# EAGLE board PC Temperature Controller (EAGLE 6.5.0)
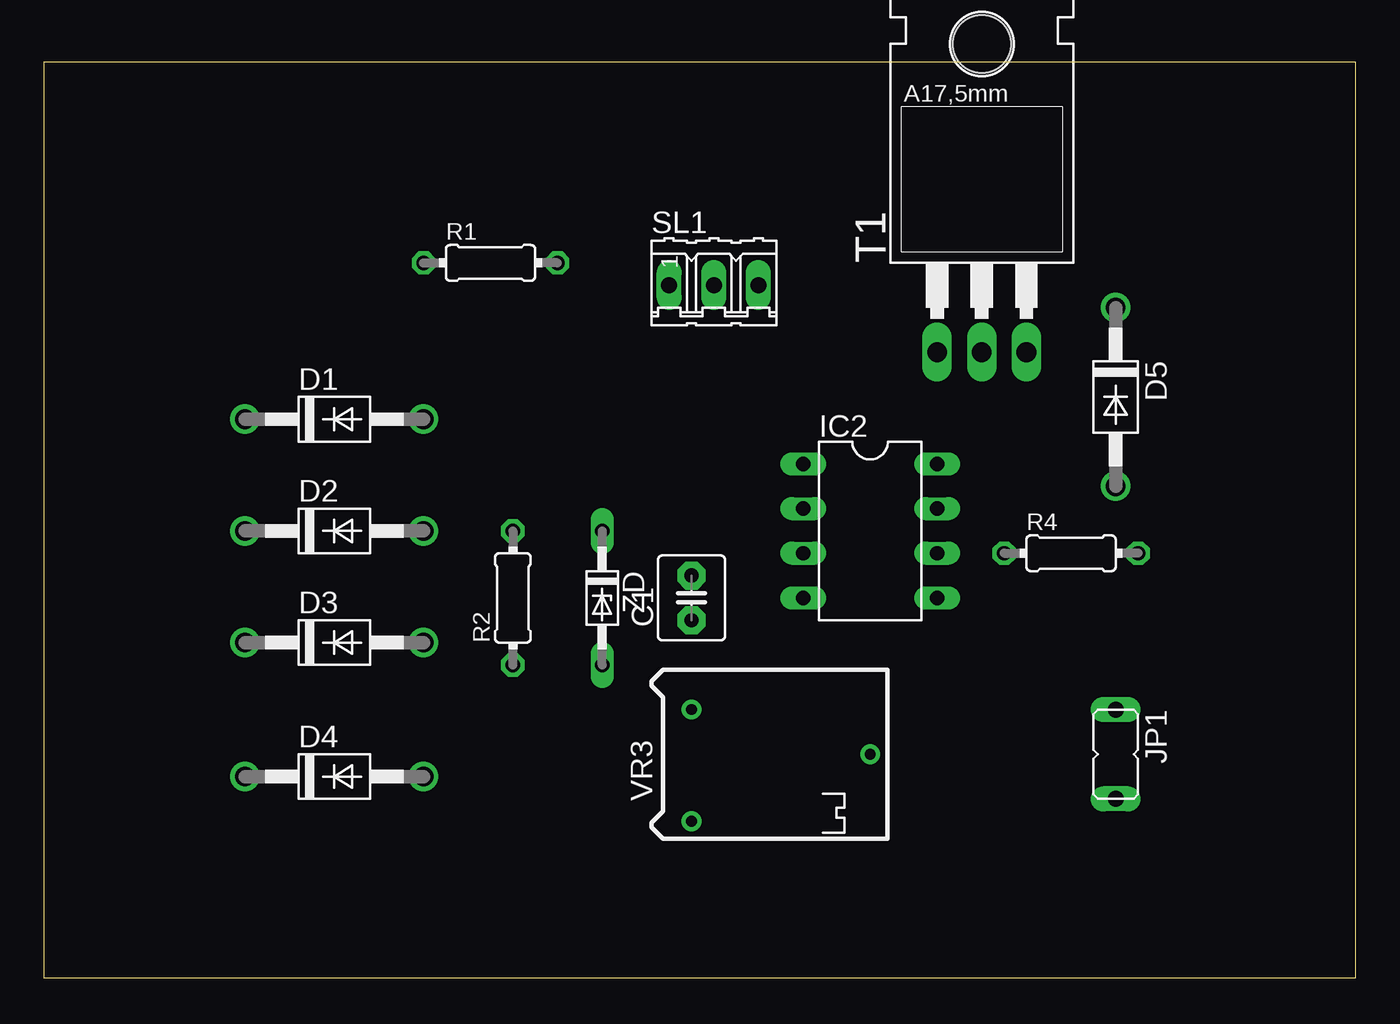
[diagram p0: board, top side]
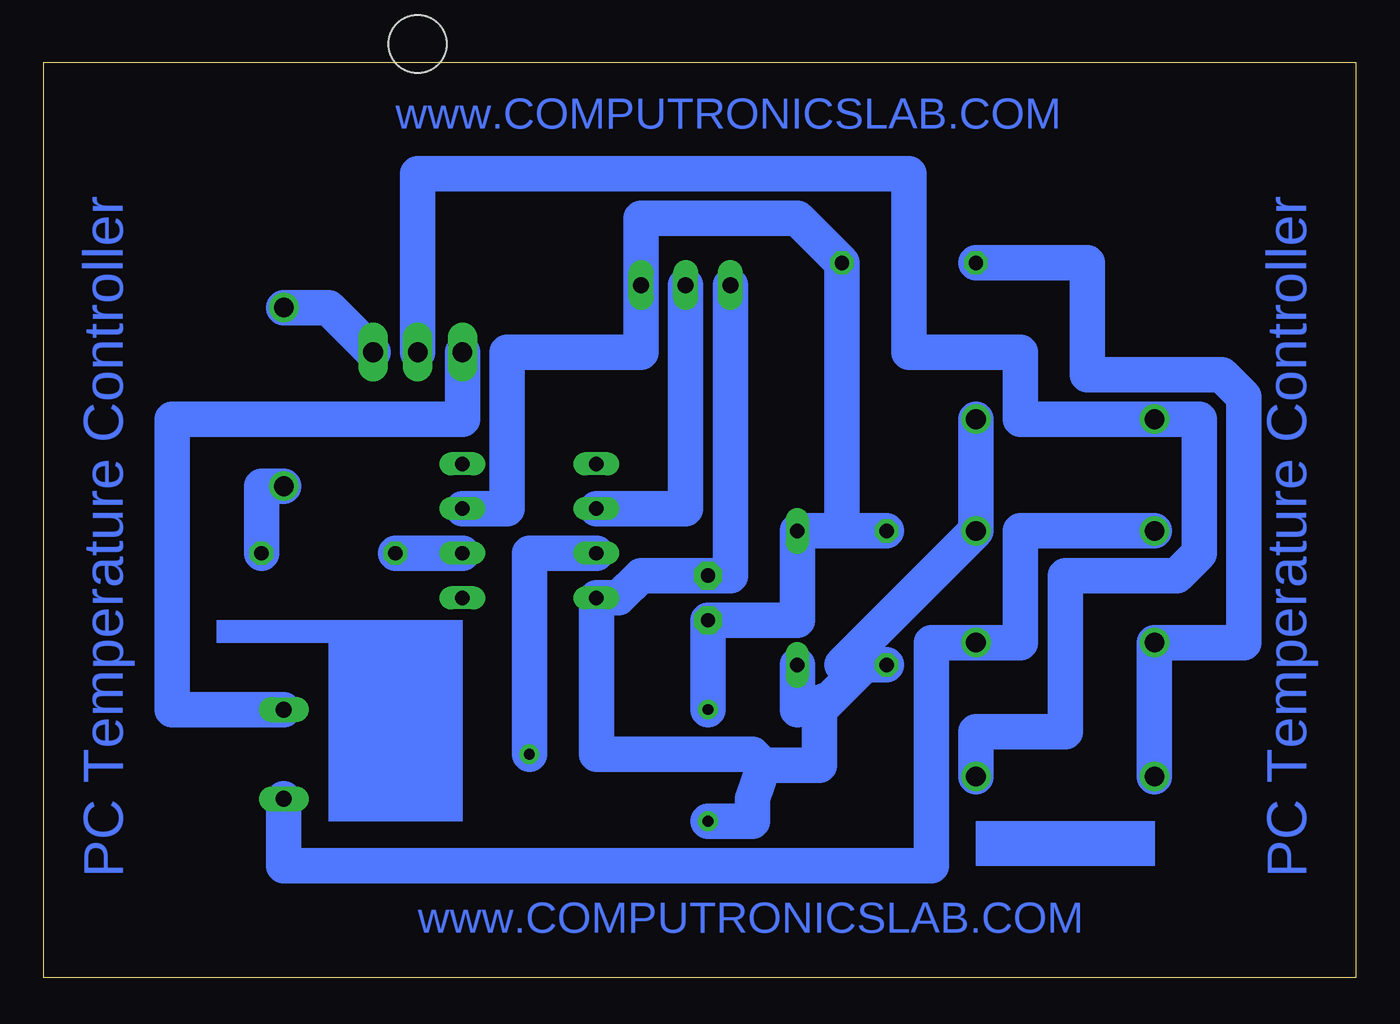
[diagram p1: board, bottom side, seen from below]

Size 74.6 x 52.06 mm. Coordinates in mm from the lower left corner, seen from the top.
Outline: 0,0 74.6,0 74.6,52.06 0,52.06 0,0
Copper layers (1*16): Top 0.035mm / dielectric 1.5mm / Bottom 0.035mm
Design rules "default *": minimum track width 80mil, minimum drill 24mil, track to track 8mil, track to pad 8mil, pad to pad 8mil, via to via 8mil, smd to smd 8mil, copper to edge 40mil, drill to drill 8mil, minimum pad ring 10mil, minimum via ring 8mil, stop-mask expansion 4mil, vias tented up to drill 0mil, thermal gap 10mil

## Footprints (pad centres in the part's own frame; a part is rotated, then mirrored left to right if it is on the bottom)
C2.5-4 = drill 0.813 pad 1.6 octagon: 1 -1.27,0; 2 1.27,0
DO41-10 = drill 1.118: A 5.08,0; C -5.08,0
DIL08 = drill 0.813 long: 1 -3.81,-3.81; 2 -1.27,-3.81; 3 1.27,-3.81; 4 3.81,-3.81; 5 3.81,3.81; 6 1.27,3.81; 7 -1.27,3.81; 8 -3.81,3.81
JP1 = drill 0.914 long: 1 0,-2.54; 2 0,2.54
0204/7 = drill 0.813 octagon: 1 -3.81,0; 2 3.81,0
03P = drill 0.914 long: 1 -2.54,0; 2 0,0; 3 2.54,0
TO220AB = drill 1.118 long: 1 -2.54,-6.35; 2 0,-6.35; 3 2.54,-6.35 | hole 3.302: 0,11.176
RTRIM64P = drill 0.61: 1 -2.54,-3.81; 2 7.62,0; 3 -2.54,2.54
DO34Z7 = drill 0.813 long: A 3.81,0; C -3.81,0

## Placement (x,y rotation side)
C1  100uf  [C2.5-4]  36.83,21.59 90 top
D1  1N4007  [DO41-10]  16.51,31.75 0 top
D2  1N4007  [DO41-10]  16.51,25.4 0 top
D3  1N4007  [DO41-10]  16.51,19.05 0 top
D4  1N4007  [DO41-10]  16.51,11.43 0 top
D5  1N4007  [DO41-10]  60.96,33.02 270 top
IC2  ca3140  [DIL08]  46.99,25.4 270 top
JP1  load  [JP1]  60.96,12.7 180 top
R1  33k  [0204/7]  25.4,40.64 0 top
R2  10k  [0204/7]  26.67,21.59 90 top
R4  120E  [0204/7]  58.42,24.13 0 top
SL1  lm35  [03P]  38.1,39.37 0 top
T1  BT136  [TO220AB]  53.34,41.91 0 top
VR3  10k  [RTRIM64P]  39.37,12.7 0 top
ZD  9v  [DO34Z7]  31.75,21.59 270 top

## Library data of the parts
C1 = capacitor-wima
D1-D5 ZD = diode
IC2 = analog-devices; MPN: AD711BQ; OC_FARNELL: 9604839; OC_NEWARK: 66F5826
JP1 = jumper
R1 R2 R4 = eagle-ltspice; SPICEMODEL: NONE; SPICEPREFIX: R
SL1 = con-amp-quick; OC_FARNELL: unknown; OC_NEWARK: unknown
T1 = triac
VR3 = resistor

## Nets
N$1: IC2.6 R4.1
N$2: D5.A R4.2
N$3: D5.C T1.3
N$4: C1.2 D1.A D2.A IC2.4 R2.1 SL1.1 VR3.1 ZD.A
N$5: D3.C D4.C R1.1
N$6: D2.C D3.A JP1.2
N$7: D1.C D4.A T1.2
N$8: C1.1 IC2.7 R1.2 R2.2 SL1.3 VR3.3 ZD.C
N$9: IC2.3 VR3.2
N$10: IC2.2 SL1.2
N$11: JP1.1 T1.1

## Tracks (layer width: path | path; a pad name or v marks a point on that pad's centre or on a via)
N$1
  Bottom 2.032: R4.1 IC2.6
N$2
  Bottom 2.032: R4.2 62.23,27.94 D5.A
N$3
  Bottom 2.032: T1.3 58.42,38.1 D5.C
N$4
  Bottom 2.032: SL1.1 35.56,22.86 C1.2 40.64,22.86 41.91,21.59 IC2.4 43.18,12.7 34.29,12.7 33.66,12.07 | D1.A D2.A 29.21,17.78 28.57,17.15 | 28.57,17.15 27.94,17.78 R2.1 | 28.57,17.15 29.84,15.88 | 29.84,15.88 30.48,15.24 30.48,13.97 30.48,12.07 33.66,12.07 | 33.66,12.07 34.29,10.16 34.29,8.89 VR3.1 | 29.84,15.88 31.75,15.24 ZD.A
N$5
  Bottom 2.032: R1.1 15.24,40.64 15.24,34.29 7.62,34.29 6.35,33.02 6.35,19.05 D3.C D4.C
N$6
  Bottom 2.032: JP1.2 60.96,7.62 60.96,6.35 57.15,6.35 34.29,6.35 24.13,6.35 24.13,19.05 D3.A 19.05,19.05 19.05,25.4 15.24,25.4 D2.C
N$7
  Bottom 2.032: D4.A 21.59,13.97 16.51,13.97 16.51,22.86 10.16,22.86 8.89,24.13 8.89,31.75 D1.C 19.05,31.75 19.05,35.56 25.4,35.56 25.4,45.72 53.34,45.72 T1.2
N$8
  Bottom 2.032: IC2.7 48.26,26.67 48.26,35.56 40.64,35.56 SL1.3 40.64,43.18 31.75,43.18 R1.2 29.21,25.4 | VR3.3 C1.1 31.75,20.32 ZD.C 29.21,25.4 | 29.21,25.4 R2.2
N$9
  Bottom 2.032: VR3.2 46.99,24.13 IC2.3
N$10
  Bottom 2.032: IC2.2 41.91,26.67 38.1,26.67 38.1,27.94 38.1,30.48 SL1.2
N$11
  Bottom 2.032: JP1.1 67.31,15.24 67.31,16.51 67.31,21.59 67.31,31.75 53.34,31.75 50.8,31.75 50.8,34.29 T1.1
(copper drawn outside any net)
  shapes: Bottom area x4

## Text on the board
Bottom: www.COMPUTRONICSLAB.COM | PC Temperature Controller | PC Temperature Controller | www.COMPUTRONICSLAB.COM